# Altium PCB STM8 Oscillograph.PcbDoc (part 3 of 3)
Units mm, origin at the board's own origin, x right, y up, seen from the top; angles counter-clockwise.
Board outline 26.01 x 35.08 mm, 2 copper layers (Top Layer, Bottom Layer); 152 components, 126 nets, 536 pads, 88 vias.
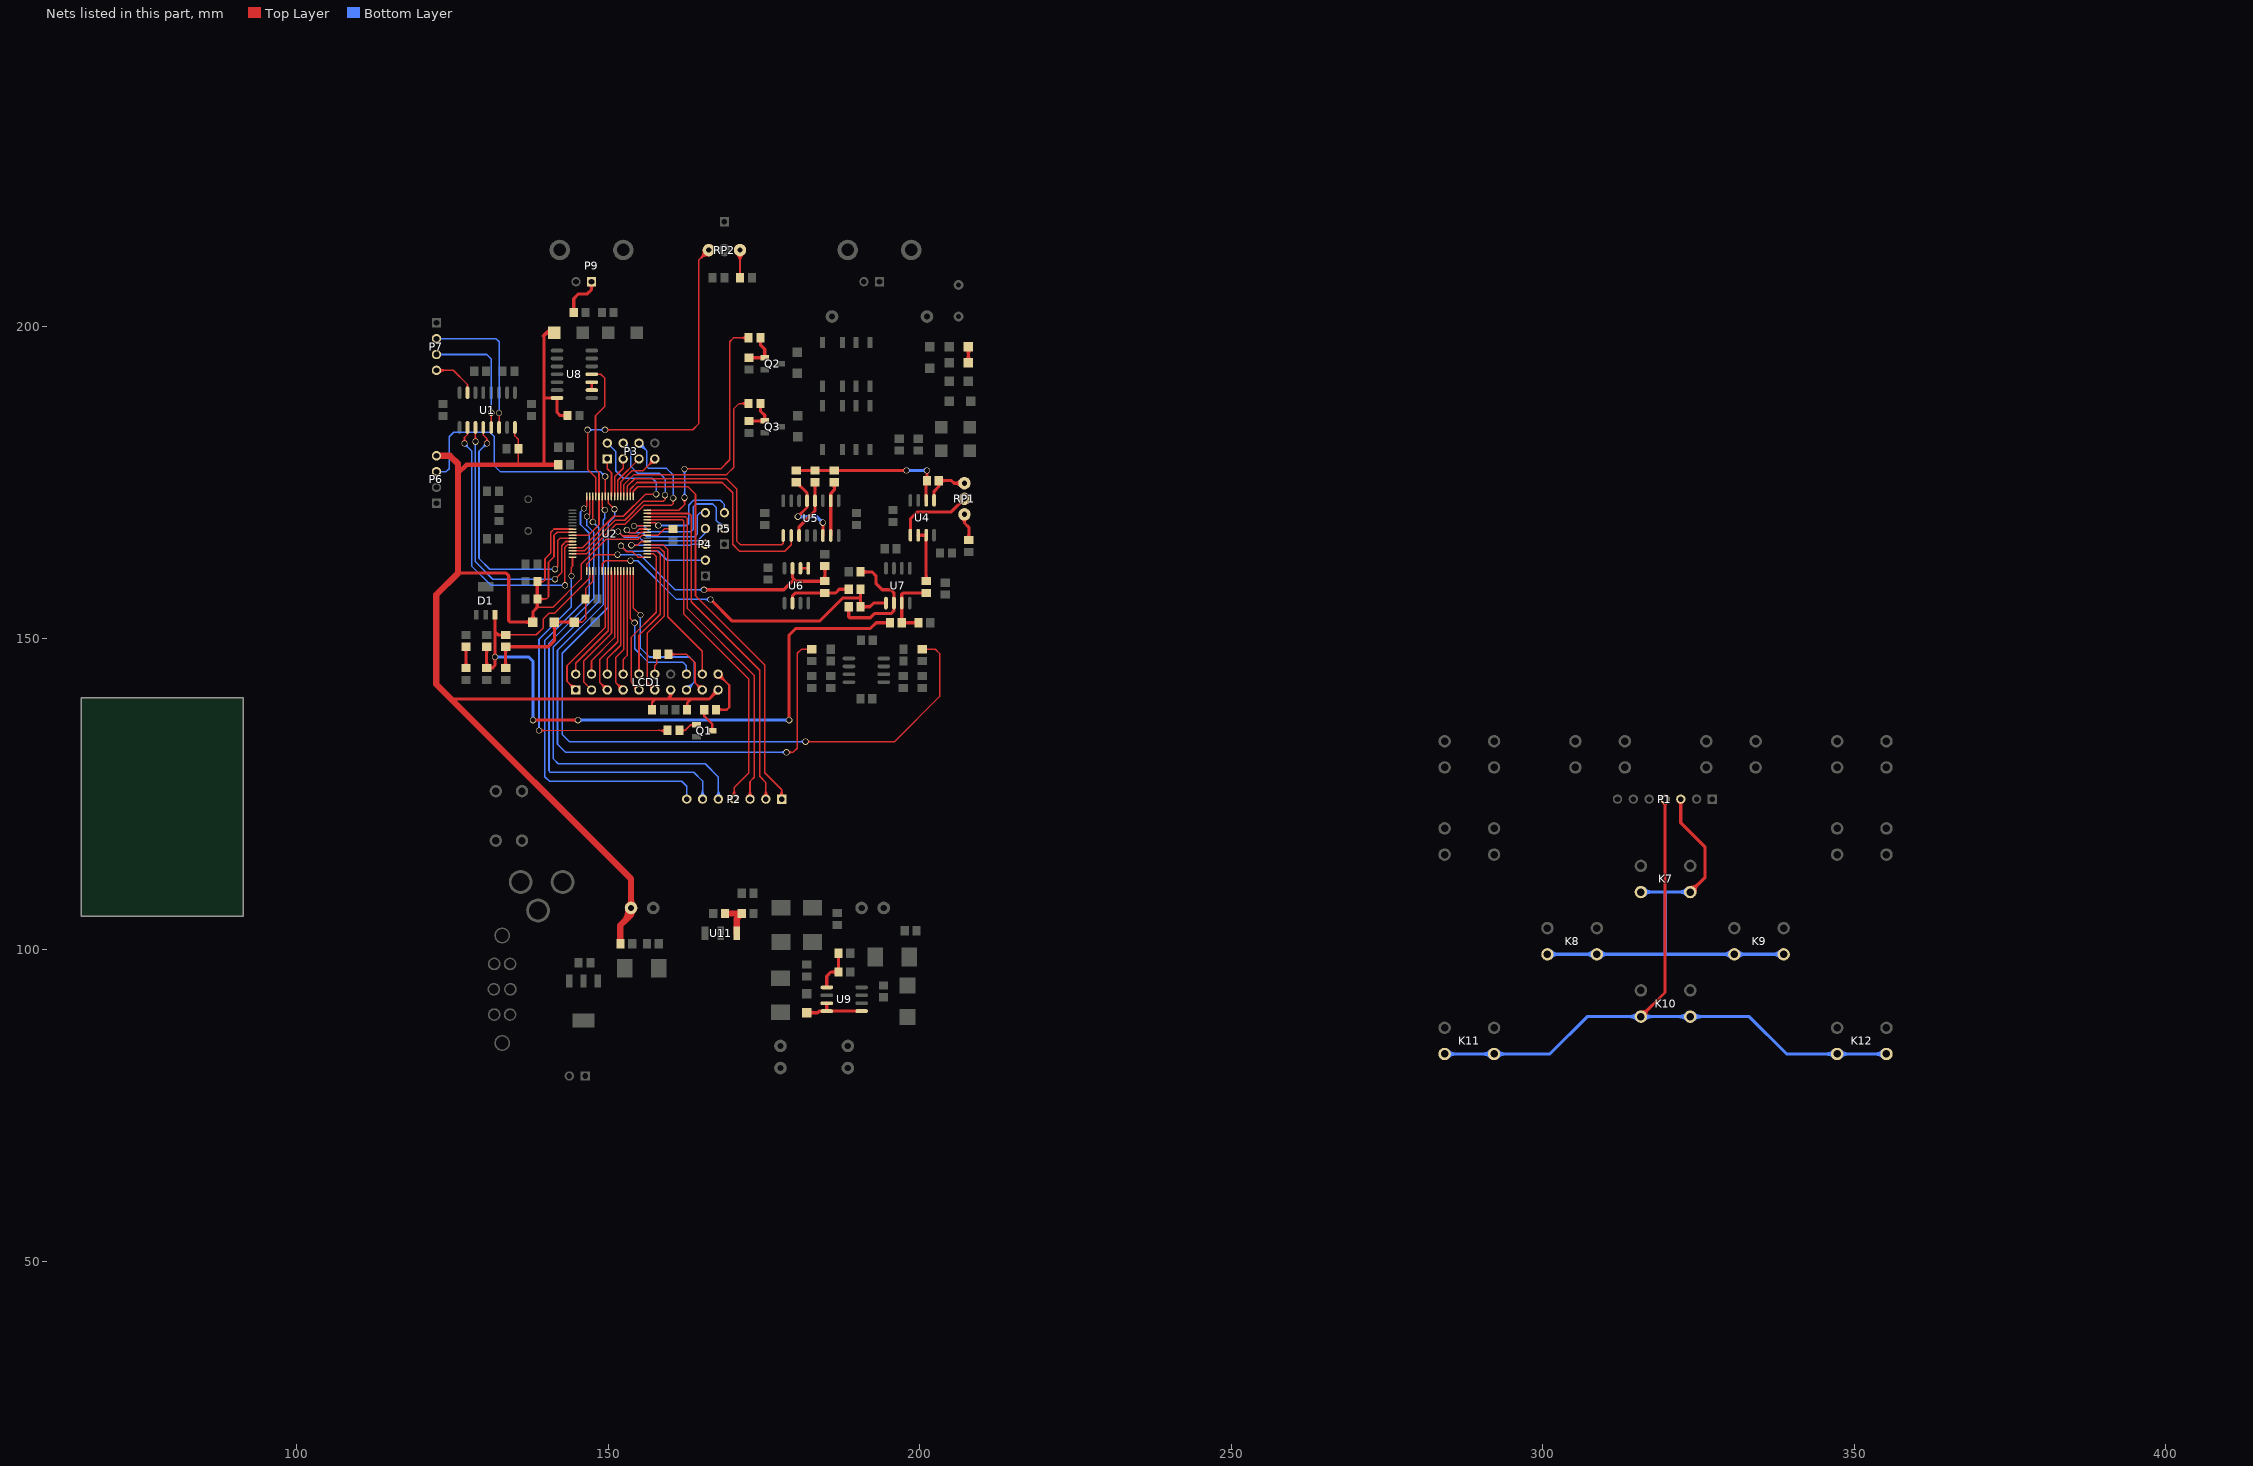
[diagram p3: the nets of this part, all layers, seen from the top]

## Via types
v1: diameter 1, hole 0.8, Top Layer to Bottom Layer, tented both sides, 88 vias

## Nets (pads, with @x,y where several pads share a name; then routed paths per layer and width w, separated by ;. In a path a pad name is that pad's centre, name@x,y a point inside that pad or via, vN(x,y) a via of type N, cw(c..) or ccw(c..) an arc to the next point about the centre after c; other vN are vias at no path point) (continued)
NetK7_1: K7.1 K7.4 K8.1 K8.4 K9.1 K9.4 P1.3 | length 100.6
  Top Layer w0.508: P1.3@321.835,123.855 cw(c320.989,123.009) 322.186,123.009 cw(c323.383,123.009) P1.3@322.537,123.855 ; P1.3@322.186,124.206 322.186,120.384 326.085,116.484 326.085,111.662 K7.1@323.71,109.287 ; K7.1@323.71,110.033 ccw(c323.71,111.834) 324.983,110.561 ccw(c326.257,109.287) K7.1@324.456,109.287
  Bottom Layer w0.508: K8.4@300.78,99.287 K9.1@338.71,99.287 ; K8.4@301.307,98.76 cw(c302.581,97.486) 302.581,99.287 cw(c302.581,101.088) K8.4@301.307,99.815 ; K8.1@308.183,98.76 ccw(c306.909,97.486) 306.909,99.287 ccw(c306.909,101.088) K8.1@308.183,99.815 ; K8.1@309.238,98.76 cw(c310.511,97.486) 310.511,99.287 cw(c310.511,101.088) K8.1@309.238,99.815 ; K7.4@315.78,109.287 K7.1@323.71,109.287 ; K7.4@316.308,108.76 cw(c317.581,107.486) 317.581,109.287 cw(c317.581,111.088) K7.4@316.308,109.815 ; 319.684,99.363 319.684,109.287 ; K7.1@323.182,108.76 ccw(c321.909,107.486) 321.909,109.287 ccw(c321.909,111.088) K7.1@323.182,109.815 ; K9.4@330.252,98.76 ccw(c328.979,97.486) 328.979,99.287 ccw(c328.979,101.088) K9.4@330.252,99.815 ; K9.4@331.307,98.76 cw(c332.581,97.486) 332.581,99.287 cw(c332.581,101.088) K9.4@331.307,99.815 ; K9.1@338.183,98.76 ccw(c336.909,97.486) 336.909,99.287 ccw(c336.909,101.088) K9.1@338.183,99.815
NetK10_1: K10.1 K10.4 K11.1 K11.4 K12.1 K12.4 P1.4 | length 145.4
  Top Layer w0.508: K10.4@315.78,89.287 319.646,93.153 P1.4@319.646,124.206 ; K10.4@315.78,90.033 ccw(c315.78,91.834) 317.054,90.56 ccw(c318.327,89.287) K10.4@316.526,89.287 ; P1.4@319.295,123.855 cw(c318.449,123.009) 319.646,123.009 cw(c320.843,123.009) P1.4@319.997,123.855
  Bottom Layer w0.508: K11.4@284.28,83.287 301.143,83.287 307.143,89.287 333.191,89.287 339.191,83.287 K12.1@355.21,83.287 ; K11.4@284.808,82.76 cw(c286.081,81.486) 286.081,83.287 cw(c286.081,85.088) K11.4@284.808,83.815 ; K11.1@291.682,82.76 ccw(c290.409,81.486) 290.409,83.287 ccw(c290.409,85.088) K11.1@291.682,83.815 ; K11.1@292.737,82.76 cw(c294.011,81.486) 294.011,83.287 cw(c294.011,85.088) K11.1@292.737,83.815 ; K10.4@315.253,88.759 ccw(c313.979,87.486) 313.979,89.287 ccw(c313.979,91.088) K10.4@315.253,89.814 ; K10.4@316.308,88.759 cw(c317.581,87.486) 317.581,89.287 cw(c317.581,91.088) K10.4@316.308,89.814 ; K10.1@323.182,88.759 ccw(c321.909,87.486) 321.909,89.287 ccw(c321.909,91.088) K10.1@323.182,89.814 ; K10.1@324.237,88.759 cw(c325.511,87.486) 325.511,89.287 cw(c325.511,91.088) K10.1@324.237,89.814 ; K12.4@346.753,82.76 ccw(c345.479,81.486) 345.479,83.287 ccw(c345.479,85.088) K12.4@346.753,83.815 ; K12.4@347.808,82.76 cw(c349.081,81.486) 349.081,83.287 cw(c349.081,85.088) K12.4@347.808,83.815 ; K12.1@354.683,82.76 ccw(c353.409,81.486) 353.409,83.287 ccw(c353.409,85.088) K12.1@354.683,83.815
NetLCD1_1: LCD1.1 U2.23 | length 26
  Top Layer w0.254: LCD1.1@144.157,141.732 ccw(c142.653,141.732) 143.716,142.796 ccw(c144.78,143.859) LCD1.1@144.78,142.355 ; LCD1.1@144.411,141.732 ccw(c143.52,141.732) 144.15,142.362 ccw(c144.78,142.992) LCD1.1@144.78,142.101 ; LCD1.1@144.78,141.732 143.383,143.129 143.383,145.618 149.522,151.757 U2.23@149.522,160.811
NetLCD1_2: LCD1.2 U2.24 | length 18.7
  Top Layer w0.254: LCD1.2@144.78,144.272 144.78,145.999 150.022,151.241 U2.24@150.022,160.811
NetLCD1_3: LCD1.3 U2.25 | length 21.4
  Top Layer w0.254: LCD1.3@147.32,141.732 146.101,142.951 146.101,146.406 150.522,150.827 U2.25@150.522,160.811
NetLCD1_4: LCD1.4 U2.26 | length 18.1
  Top Layer w0.254: LCD1.4@147.32,144.272 147.32,146.431 151.022,150.133 U2.26@151.022,160.811
NetLCD1_5: LCD1.5 U2.27 | length 24.6
  Top Layer w0.254: LCD1.5@149.237,141.732 ccw(c147.733,141.732) 148.796,142.796 ccw(c149.86,143.859) LCD1.5@149.86,142.355 ; LCD1.5@149.491,141.732 ccw(c148.6,141.732) 149.23,142.362 ccw(c149.86,142.992) LCD1.5@149.86,142.101 ; LCD1.5@149.86,141.732 148.615,142.977 148.615,146.558 151.522,149.465 U2.27@151.522,160.811
NetLCD1_6: LCD1.6 U2.28 | length 17.4
  Top Layer w0.254: LCD1.6@149.86,144.272 149.86,146.761 152.022,148.923 U2.28@152.022,160.811
NetLCD1_7: LCD1.7 U2.29 | length 23.9
  Top Layer w0.254: LCD1.7@151.777,141.732 ccw(c150.273,141.732) 151.336,142.796 ccw(c152.4,143.859) LCD1.7@152.4,142.355 ; LCD1.7@152.031,141.732 ccw(c151.14,141.732) 151.77,142.362 ccw(c152.4,142.992) LCD1.7@152.4,142.101 ; LCD1.7@152.4,141.732 151.206,142.926 151.206,146.939 152.522,148.255 U2.29@152.522,160.811
NetLCD1_8: LCD1.8 U2.30 | length 16.8
  Top Layer w0.254: LCD1.8@152.4,144.272 152.4,146.634 153.022,147.256 U2.30@153.022,160.811
NetLCD1_9: LCD1.9 U2.34 | length 29
  Top Layer w0.254: LCD1.9@154.317,141.732 ccw(c152.813,141.732) 153.876,142.796 ccw(c154.94,143.859) LCD1.9@154.94,142.355 ; LCD1.9@154.571,141.732 ccw(c153.68,141.732) 154.31,142.362 ccw(c154.94,142.992) LCD1.9@154.94,142.101 ; LCD1.9@154.94,141.732 153.721,142.951 153.721,150.216 157.709,154.203 157.709,163.17 157.317,163.561 U2.34@156.272,163.561
NetLCD1_10: LCD1.10 U2.35 | length 22.9
  Top Layer w0.254: LCD1.10@154.94,144.272 154.94,150.495 158.344,153.899 158.344,163.477 157.759,164.061 U2.35@156.272,164.061
NetLCD1_11: LCD1.11 U2.36 | length 30.5
  Top Layer w0.254: U2.36@156.272,164.561 158.248,164.561 158.979,163.83 158.979,153.594 156.27,150.885 156.27,142.942 LCD1.11@157.48,141.732 ; LCD1.11@156.857,141.732 ccw(c155.353,141.732) 156.416,142.796 ccw(c157.48,143.859) LCD1.11@157.48,142.355 ; LCD1.11@157.111,141.732 ccw(c156.22,141.732) 156.85,142.362 ccw(c157.48,142.992) LCD1.11@157.48,142.101
NetLCD1_12: LCD1.12 R7.1 | length 3.3
  Top Layer w0.254: LCD1.12@157.48,144.272 157.48,145.644 157.8,145.964 R7.1@157.8,147.447
NetLCD1_15: LCD1.15 U2.32 | length 31.2
  Top Layer w0.254: U2.32@154.022,160.811 154.022,154.893 v1(155.169,153.746)
  Bottom Layer w0.254: v1(155.169,153.746) 155.169,148.463 156.616,147.015 163.043,147.015 163.855,146.202 163.855,143.027 LCD1.15@162.56,141.732 ; LCD1.15@162.56,142.101 ccw(c162.56,142.992) 163.19,142.362 ccw(c163.82,141.732) LCD1.15@162.929,141.732 ; LCD1.15@162.56,142.355 ccw(c162.56,143.859) 163.624,142.796 ccw(c164.687,141.732) LCD1.15@163.183,141.732
NetLCD1_16: LCD1.16 U2.31 | length 23.5
  Top Layer w0.254: U2.31@153.522,160.811 153.522,153.208 v1@154.242,152.489
  Bottom Layer w0.254: v1@154.242,152.489 154.242,148.349 156.388,146.202 161.95,146.202 162.56,145.593 LCD1.16@162.56,144.272
  other v1: 154.254,152.502
NetLCD1_17: LCD1.17 R7.2 | length 15.4
  Top Layer w0.254: R7.2@159.7,147.447 162.56,147.447 163.932,146.075 163.932,142.9 LCD1.17@165.1,141.732 ; R7.2@160.07,147.077 cw(c160.963,146.184) 160.963,147.447 cw(c160.963,148.71) R7.2@160.07,147.817 ; LCD1.17@164.477,141.732 ccw(c162.973,141.732) 164.036,142.796 ccw(c165.1,143.859) LCD1.17@165.1,142.355 ; LCD1.17@164.731,141.732 ccw(c163.84,141.732) 164.47,142.362 ccw(c165.1,142.992) LCD1.17@165.1,142.101
NetLCD1_18: LCD1.18 U2.37 | length 25.9
  Top Layer w0.254: U2.37@156.272,165.061 158.764,165.061 159.563,164.262 159.563,153.492 165.1,147.955 LCD1.18@165.1,144.272
NetLCD1_20: LCD1.20 R8.2 | length 12.2
  Top Layer w0.381: R8.2@167.32,138.557 169.012,138.557 169.418,138.963 169.418,142.494 LCD1.20@167.64,144.272 ; LCD1.20@167.64,143.713 cw(c167.64,142.362) 168.595,143.317 cw(c169.55,144.272) LCD1.20@168.199,144.272 ; R8.2@167.645,138.232 cw(c168.429,137.448) 168.429,138.557 cw(c168.429,139.666) R8.2@167.645,138.882
NetP2_1: P2.1 U2.49 | length 70
  Top Layer w0.254: U2.49@154.022,172.811 154.022,173.631 154.737,174.346 162.814,174.346 164.008,173.152 164.008,156.87 175.133,145.745 175.133,128.422 177.845,125.71 P2.1@177.845,124.206 ; P2.1@177.404,124.647 ccw(c176.341,125.71) 177.845,125.71 ccw(c179.349,125.71) P2.1@178.286,124.647 ; P2.1@177.584,124.467 ccw(c176.954,125.097) 177.845,125.097 ccw(c178.736,125.097) P2.1@178.106,124.467
NetP2_2: P2.2 U2.47 | length 61.5
  Top Layer w0.254: U2.47@156.272,170.061 163.035,170.061 163.347,169.748 163.347,155.88 174.32,144.907 174.32,127.864 175.305,126.879 P2.2@175.305,124.206 ; P2.2@174.864,124.647 ccw(c173.801,125.71) 175.305,125.71 ccw(c176.809,125.71) P2.2@175.746,124.647 ; P2.2@175.044,124.467 ccw(c174.414,125.097) 175.305,125.097 ccw(c176.196,125.097) P2.2@175.566,124.467
NetP2_3: P2.3 U2.46 | length 60.1
  Top Layer w0.254: U2.46@156.272,169.561 162.417,169.561 162.712,169.266 162.712,154.788 173.457,144.043 173.457,127.711 172.765,127.02 P2.3@172.765,124.206 ; P2.3@172.324,124.647 ccw(c171.261,125.71) 172.765,125.71 ccw(c174.269,125.71) P2.3@173.206,124.647 ; P2.3@172.504,124.467 ccw(c171.874,125.097) 172.765,125.097 ccw(c173.656,125.097) P2.3@173.026,124.467
NetP2_4: P2.4 U2.45 | length 59.7
  Top Layer w0.254: U2.45@156.272,169.061 161.901,169.061 162.128,168.834 162.128,153.924 172.593,143.459 172.593,128.422 170.225,126.054 P2.4@170.225,124.206 ; P2.4@169.784,124.647 ccw(c168.721,125.71) 170.225,125.71 ccw(c171.729,125.71) P2.4@170.666,124.647 ; P2.4@169.964,124.467 ccw(c169.334,125.097) 170.225,125.097 ccw(c171.116,125.097) P2.4@170.486,124.467
NetP2_5: P2.5 U2.62 | length 80.5
  Top Layer w0.254: v1(147.522,168.707) U2.62@147.522,172.811
  Bottom Layer w0.254: v1(147.522,168.707) 148.463,167.766 148.463,155.931 141.199,148.666 141.199,130.658 141.986,129.87 165.557,129.87 167.685,127.742 P2.5@167.685,124.206 ; P2.5@167.244,124.647 ccw(c166.181,125.71) 167.685,125.71 ccw(c169.189,125.71) P2.5@168.126,124.647 ; P2.5@167.424,124.467 ccw(c166.794,125.097) 167.685,125.097 ccw(c168.576,125.097) P2.5@167.946,124.467
NetP2_6: P2.6 U2.63 | length 79.7
  Top Layer w0.254: v1(146.583,169.57) 147.022,170.009 U2.63@147.022,172.811
  Bottom Layer w0.254: v1(146.583,169.57) 146.583,168.123 147.701,167.005 147.701,156.464 140.487,149.25 140.487,128.727 140.691,128.524 163.728,128.524 165.145,127.107 P2.6@165.145,124.206 ; P2.6@164.704,124.647 ccw(c163.641,125.71) 165.145,125.71 ccw(c166.649,125.71) P2.6@165.586,124.647 ; P2.6@164.884,124.467 ccw(c164.254,125.097) 165.145,125.097 ccw(c166.036,125.097) P2.6@165.406,124.467
NetP2_7: P2.7 U2.64 | length 74.4
  Top Layer w0.254: v1(146.126,170.866) 146.522,171.262 U2.64@146.522,172.811
  Bottom Layer w0.254: v1(146.126,170.866) 145.552,170.292 145.552,168.29 146.964,166.878 146.964,156.794 139.827,149.657 139.827,127.813 140.564,127.076 161.798,127.076 162.605,126.269 P2.7@162.605,124.206
NetP3_1: P3.1 U2.56 | length 6.3
  Top Layer w0.254: P3.1@149.86,178.816 149.86,177.241 150.522,176.579 U2.56@150.522,172.811
NetP3_2: P3.2 U2.55 | length 6.6
  Top Layer w0.254: U2.55@151.022,172.811 151.022,175.939 152.4,177.317 P3.2@152.4,178.816
NetP3_3: P3.3 U2.54 | length 7.4
  Top Layer w0.254: U2.54@151.522,172.811 151.522,175.398 P3.3@154.94,178.816
NetP3_4: P3.4 U2.53 | length 13.1
  Top Layer w0.254: U2.53@152.022,172.811 152.022,175.111 153.822,176.911 155.575,176.911 P3.4@157.48,178.816 ; P3.4@156.857,178.816 cw(c155.353,178.816) 156.416,177.752 cw(c157.48,176.689) P3.4@157.48,178.193 ; P3.4@157.111,178.816 cw(c156.22,178.816) 156.85,178.186 cw(c157.48,177.556) P3.4@157.48,178.447
NetP3_5: P3.5 U2.13 | length 31.2
  Top Layer w0.254: U2.13@144.272,164.561 145.867,164.561 150.906,169.601 152.43,169.601 155.981,173.152 v1(157.709,173.152)
  Bottom Layer w0.254: P3.5@149.86,181.356 151.206,180.01 151.206,176.911 152.4,175.717 157.074,175.717 157.709,175.082 v1(157.709,173.152)
NetP3_6: P3.6 U2.14 | length 36
  Top Layer w0.254: U2.14@144.272,164.061 146.179,164.061 151.097,168.979 152.634,168.979 155.657,172.002 158.845,172.002 159.131,172.288 v1(159.131,172.999)
  Bottom Layer w0.254: P3.6@152.4,180.733 cw(c152.4,179.229) 153.464,180.292 cw(c154.527,181.356) P3.6@153.023,181.356 ; P3.6@152.4,180.987 cw(c152.4,180.096) 153.03,180.726 cw(c153.66,181.356) P3.6@152.769,181.356 ; P3.6@152.4,181.356 153.645,180.111 153.645,177.597 154.762,176.479 158.293,176.479 159.131,175.641 v1(159.131,172.999)
NetP3_7: P3.7 U2.15 | length 36.9
  Top Layer w0.254: U2.15@144.272,163.561 146.492,163.561 151.282,168.351 152.73,168.351 155.753,171.374 160.147,171.374 160.426,171.653 v1(160.426,172.517)
  Bottom Layer w0.254: P3.7@154.94,180.733 cw(c154.94,179.229) 156.004,180.292 cw(c157.067,181.356) P3.7@155.563,181.356 ; P3.7@154.94,180.987 cw(c154.94,180.096) 155.57,180.726 cw(c156.2,181.356) P3.7@155.309,181.356 ; P3.7@154.94,181.356 156.21,180.086 156.21,177.597 156.515,177.292 159.36,177.292 160.426,176.225 v1(160.426,172.517)
NetP4_2: P4.2 U2.33 | length 19.5
  Top Layer w0.254: v1(152.044,164.871) 152.984,163.932 153.899,163.932 154.769,163.061 U2.33@156.272,163.061
  Bottom Layer w0.254: v1(152.044,164.871) 152.933,163.982 158.039,163.982 159.461,162.56 P4.2@165.608,162.56
NetP4_3: P4.3 U2.38 | length 14.8
  Top Layer w0.254: v1(153.708,164.96) 154.699,164.96 155.299,165.561 U2.38@156.272,165.561
  Bottom Layer w0.254: v1(153.708,164.96) 163.157,164.96 163.297,165.1 P4.3@165.608,165.1
NetP4_4: P4.4 U2.41 | length 21.1
  Top Layer w0.254: v1(151.587,167.183) 152.324,166.446 154.635,166.446 155.25,167.061 U2.41@156.272,167.061
  Bottom Layer w0.254: v1(151.587,167.183) 152.552,166.218 155.016,166.218 155.55,165.684 164.338,165.684 165.608,166.954 P4.4@165.608,167.64
NetP4_5: P4.5 U2.42 | length 20.9
  Top Layer w0.254: v1(152.984,167.386) 153.416,166.954 154.381,166.954 154.988,167.561 U2.42@156.272,167.561
  Bottom Layer w0.254: v1(152.984,167.386) 153.416,166.954 155.524,166.954 156.159,166.319 163.881,166.319 164.313,166.751 164.313,169.748 164.744,170.18 ; P4.5@165.017,169.984 ccw(c164.744,169.893) 164.744,170.18 ; P4.5@165.017,170.376 cw(c164.744,170.467) 164.744,170.18 ; P4.5@165.608,170.18 164.744,170.18
NetP5_2: P5.2 U2.43 | length 27.6
  Top Layer w0.254: v1(154.153,168.061) U2.43@156.272,168.061
  Bottom Layer w0.254: v1(154.153,168.061) 155.687,168.061 156.616,167.132 163.297,167.132 163.652,167.488 163.652,171.094 164.135,171.577 166.802,171.577 167.31,171.069 167.31,168.986 P5.2@168.656,167.64 ; P5.2@168.033,167.64 ccw(c166.529,167.64) 167.592,168.704 ccw(c168.656,169.767) P5.2@168.656,168.263 ; P5.2@168.287,167.64 ccw(c167.396,167.64) 168.026,168.27 ccw(c168.656,168.9) P5.2@168.656,168.009
NetP5_3: P5.3 U2.44 | length 17.6
  Top Layer w0.254: U2.44@156.272,168.561 157.6,168.561 v1(158.039,168.123)
  Bottom Layer w0.254: v1(158.039,168.123) 162.636,168.123 162.941,168.427 162.941,171.399 163.703,172.161 167.996,172.161 168.656,171.501 P5.3@168.656,170.18
NetP6_3: P6.3 U2.58 | length 43
  Top Layer w0.254: U2.58@149.522,172.811 v1(149.522,175.997)
  Bottom Layer w0.254: P6.3@122.428,176.784 124.003,176.784 124.46,177.241 124.46,182.372 125.197,183.109 131.013,183.109 131.674,182.448 131.674,177.749 132.639,176.784 148.735,176.784 v1(149.522,175.997) ; v1@149.149,175.997 ccw(c148.249,175.997) 148.885,176.633 ccw(c149.522,177.27) v1@149.522,176.37
NetP7_2: P7.2 U1.14 | length 24
  Top Layer w0.254: U1.14@132.486,183.871 v1(132.486,186.207)
  Bottom Layer w0.254: P7.2@122.428,198.12 131.978,198.12 132.486,197.612 v1(132.486,186.207)
NetP7_3: P7.3 U1.13 | length 20.1
  Top Layer w0.254: U1.13@131.216,183.871 v1(131.216,186.233)
  Bottom Layer w0.254: P7.3@122.428,195.58 130.48,195.58 131.216,194.843 v1(131.216,186.233)
NetP7_4: P7.4 U1.7 | length 11
  Top Layer w0.254: P7.4@122.428,193.04 125.12,193.04 127.406,190.754 U1.7@127.406,189.459 ; P7.4@122.689,192.779 cw(c123.319,192.149) 123.319,193.04 cw(c123.319,193.931) P7.4@122.689,193.301 ; P7.4@122.869,192.599 cw(c123.932,191.536) 123.932,193.04 cw(c123.932,194.544) P7.4@122.869,193.481
NetP9_1: P9.1 R35.1 | length 8.8
  Top Layer w0.508: R35.1@144.465,202.311 144.465,204.536 145.237,205.308 146.634,205.308 147.32,205.994 P9.1@147.32,207.264 ; P9.1@146.969,206.913 cw(c146.123,206.067) 147.32,206.067 cw(c148.517,206.067) P9.1@147.671,206.913
NetQ1_1: Q1.1 R9.2 | length 5.2
  Top Layer w0.254: R9.2@161.427,135.255 162.357,135.255 ; R9.2@161.874,134.984 cw(c162.357,134.69) 162.357,135.255 ; R9.2@161.874,135.526 ccw(c162.357,135.82) 162.357,135.255 ; Q1.1@163.658,135.946 ccw(c163.246,135.616) 163.246,136.144 ; Q1.1@163.658,136.342 cw(c163.246,136.672) 163.246,136.144 ; Q1.1@164.16,136.144 163.246,136.144 ; 162.357,135.255 163.246,136.144
NetQ1_3: Q1.3 R8.1 | length 6.2
  Top Layer w0.381: R8.1@165.14,138.092 cw(c164.706,137.526) 165.42,137.526 ; R8.1@165.42,138.557 165.42,137.526 ; R8.1@165.7,138.092 ccw(c166.134,137.526) 165.42,137.526 ; Q1.3@166.521,135.371 ccw(c166.087,135.805) 166.7,135.805 ccw(c167.313,135.805) Q1.3@166.88,135.371 ; Q1.3@166.7,135.191 166.7,136.246 165.42,137.526
NetQ2_1: Q2.1 R12.2 R13.2 | length 7.5
  Top Layer w0.508: R12.2@172.593,195.057 172.608,195.072 Q2.1@175.133,195.072 175.133,196.418 174.432,197.119 R13.2@174.432,198.247 ; Q2.1@174.744,194.937 ccw(c174.419,194.612) 174.419,195.072 ccw(c174.419,195.532) Q2.1@174.744,195.207 ; Q2.1@174.998,195.207 ccw(c174.673,195.532) 175.133,195.532 ccw(c175.593,195.532) Q2.1@175.268,195.207
NetQ3_1: Q3.1 R22.2 R23.2 | length 6.4
  Top Layer w0.508: R22.2@172.593,184.897 172.608,184.912 Q3.1@175.133,184.912 175.133,185.801 174.432,186.502 R23.2@174.432,187.706 ; Q3.1@174.744,184.777 ccw(c174.419,184.452) 174.419,184.912 ccw(c174.419,185.372) Q3.1@174.744,185.047
NetR3_2: R3.2 R4.1 | length 6.4
  Top Layer w0.508: R4.1@126.898,145.517 ccw(c126.222,146.193) 127.178,146.193 ccw(c128.134,146.193) R4.1@127.458,145.517 ; R3.2@126.898,148.391 cw(c126.222,147.715) 127.178,147.715 cw(c128.134,147.715) R3.2@127.458,148.391 ; R4.1@127.178,145.237 R3.2@127.178,148.671
NetR9_1: R9.1 U2.16 | length 54.9
  Top Layer w0.254: v1(138.887,135.204) R9.1@159.527,135.255 ; v1@139.15,135.469 ccw(c139.785,136.107) 139.788,135.206 ccw(c139.79,134.306) v1@139.152,134.941 ; v1(144.094,160.02) 144.094,161.442 144.272,161.62 U2.16@144.272,163.061 ; 158.023,135.251 cw(c158.027,133.647) R9.1@159.158,134.784 ; 158.506,135.252 ccw(c158.503,136.174) R9.1@159.156,135.524 ; 158.636,135.253 cw(c158.639,134.262) R9.1@159.337,134.964
  Bottom Layer w0.254: v1(138.887,135.204) 138.887,149.885 144.094,155.092 v1(144.094,160.02)
NetR10_1: R10.1 R11.1 R31.1 U7.3 | length 14.2
  Top Layer w0.508: R10.1@197.409,152.247 cw(c198.085,151.571) 198.085,152.527 cw(c198.085,153.483) R10.1@197.409,152.807 ; R11.1@199.516,152.247 ccw(c198.84,151.571) 198.84,152.527 ccw(c198.84,153.483) R11.1@199.516,152.807 ; R11.1@199.796,152.527 R10.1@197.129,152.527 U7.3@197.129,155.677 197.129,157.124 197.297,157.292 R31.1@201.041,157.292
NetR13_1: R13.1 U2.48 | length 48.4
  Top Layer w0.254: U2.48@156.272,170.561 161.341,170.561 162.255,171.475 v1(162.255,172.593) ; v1@161.991,172.329 cw(c161.355,171.693) 162.255,171.693 cw(c163.156,171.693) v1@162.519,172.329 ; v1(162.255,177.216) 168.046,177.216 169.494,178.664 169.494,197.637 170.104,198.247 R13.1@172.532,198.247 ; R13.1@172.162,197.877 ccw(c171.269,196.984) 171.269,198.247 ccw(c171.269,199.51) R13.1@172.162,198.617
  Bottom Layer w0.254: v1@161.991,172.857 ccw(c161.355,173.493) 162.255,173.493 ccw(c163.156,173.493) v1@162.519,172.857 ; v1@161.991,176.952 cw(c161.355,176.315) 162.255,176.315 cw(c163.156,176.315) v1@162.519,176.952 ; v1(162.255,172.593) v1(162.255,177.216)
NetR14_1: R14.1 R15.2 | length 6.4
  Top Layer w0.508: R15.2@207.464,194.618 ccw(c206.596,195.486) 207.823,195.486 ccw(c209.049,195.486) R15.2@208.182,194.618 ; R14.1@207.464,196.44 cw(c206.596,195.573) 207.823,195.573 cw(c209.049,195.573) R14.1@208.182,196.44 ; R15.2@207.823,194.259 R14.1@207.823,196.799
NetR19_2: R19.2 U2.59 | length 103
  Top Layer w0.254: U2.59@149.022,172.811 149.022,171.043 v1(149.454,170.612) ; v1(178.613,131.724) 179.68,131.724 180.34,132.385 180.34,147.599 181.011,148.27 R19.2@182.651,148.27 ; v1@178.877,131.461 cw(c179.513,130.824) 179.513,131.724 cw(c179.513,132.625) v1@178.877,131.988
  Bottom Layer w0.254: v1(149.454,170.612) 149.454,169.291 149.225,169.062 149.225,155.448 141.859,148.082 141.859,133.02 143.154,131.724 v1(178.613,131.724) ; v1@178.349,131.461 ccw(c177.712,130.824) 177.712,131.724 ccw(c177.712,132.625) v1@178.349,131.988
NetR20_2: R20.2 U2.57 | length 119
  Top Layer w0.254: U2.57@150.022,172.811 150.022,171.745 v1(151.028,170.739) ; v1(181.661,133.426) 195.961,133.426 203.2,140.665 203.2,147.574 202.504,148.27 R20.2@200.431,148.27 ; v1@181.925,133.162 cw(c182.561,132.526) 182.561,133.426 cw(c182.561,134.327) v1@181.925,133.69
  Bottom Layer w0.254: v1(151.028,170.739) 151.028,169.596 149.987,168.554 149.987,154.991 142.621,147.625 142.621,134.595 143.789,133.426 v1(181.661,133.426) ; v1@181.397,133.162 ccw(c180.76,132.526) 180.76,133.426 ccw(c180.76,134.327) v1@181.397,133.69
NetR23_1: R23.1 U2.52 | length 34.8
  Top Layer w0.254: U2.52@152.522,172.811 152.522,174.696 154.127,176.301 168.986,176.301 170.18,177.495 170.18,186.893 170.993,187.706 R23.1@172.532,187.706 ; R23.1@172.162,187.336 ccw(c171.269,186.443) 171.269,187.706 ccw(c171.269,188.969) R23.1@172.162,188.076
NetR24_1: R24.1 RP1.3 U4.1 | length 11.8
  Top Layer w0.508: U4.1@202.311,172.161 202.311,173.634 203.058,174.381 R24.1@203.058,175.336 205.105,175.336 205.526,174.915 RP1.3@207.188,174.915 ; R24.1@203.338,175.056 cw(c204.014,174.38) 204.014,175.336 cw(c204.014,176.292) R24.1@203.338,175.616 ; RP1.3@206.63,174.419 ccw(c205.526,173.437) 205.526,174.915 ccw(c205.526,176.393) RP1.3@206.63,175.411
NetR24_2: R24.2 R25.2 R26.2 R27.2 U4.2 | length 31.7
  Top Layer w0.508: R27.2@180.213,176.972 R26.2@186.309,176.972 ; R25.2@183.185,176.972 R26.2@186.309,176.972 ; v1@197.702,176.798 ccw(c197.282,176.378) 197.282,176.972 ccw(c197.282,177.566) v1@197.702,177.146 ; v1(197.876,176.972) R26.2@186.309,176.972 ; U4.2@201.041,172.161 201.041,175.219 R24.2@201.158,175.336 v1(201.158,176.972)
  Bottom Layer w0.508: v1(197.876,176.972) v1(201.158,176.972) ; v1@198.05,176.798 cw(c198.47,176.378) 198.47,176.972 ; v1@198.05,177.146 ccw(c198.47,177.566) 198.47,176.972 ; 200.564,176.972 cw(c200.564,176.378) v1@200.984,176.798 ; 200.564,176.972 ccw(c200.564,177.566) v1@200.984,177.146
NetR25_1: R25.1 U5.4 U5.11 | length 11.1
  Top Layer w0.508: U5.11@180.645,166.522 180.645,167.919 183.185,170.459 U5.4@183.185,172.11 R25.1@183.185,175.072 ; R25.1@182.905,174.792 cw(c182.229,174.116) 183.185,174.116 cw(c184.141,174.116) R25.1@183.465,174.792
NetR26_1: R26.1 U5.2 U5.15 | length 10.3
  Top Layer w0.508: U5.15@185.725,166.522 U5.2@185.725,172.11 185.725,173.253 186.309,173.838 R26.1@186.309,175.072 ; R26.1@186.029,174.792 cw(c185.353,174.116) 186.309,174.116 cw(c187.265,174.116) R26.1@186.589,174.792
NetR27_1: R27.1 U5.5 U5.14 | length 15.2
  Top Layer w0.508: R27.1@180.213,175.072 181.915,173.37 U5.5@181.915,172.11 181.915,171.018 v1(180.442,169.545) ; U5.14@184.455,166.522 v1(184.455,168.58)
  Bottom Layer w0.508: v1(180.442,169.545) 183.49,169.545 v1(184.455,168.58) ; v1@180.616,169.371 cw(c181.036,168.951) 181.036,169.545 cw(c181.036,170.139) v1@180.616,169.719 ; 184.034,169 ccw(c184.455,169.421) v1@184.455,168.826 ; 184.035,168.999 cw(c183.616,168.58) v1@184.209,168.58
NetR28_1: R28.1 RP1.1 | length 7.7
  Top Layer w0.508: RP1.1@206.777,169.293 cw(c206.273,168.529) 207.188,168.529 ; RP1.1@207.188,169.915 207.188,168.529 ; RP1.1@207.599,169.293 ccw(c208.103,168.529) 207.188,168.529 ; R28.1@207.619,166.076 ccw(c206.943,166.752) 207.899,166.752 ccw(c208.855,166.752) R28.1@208.179,166.076 ; R28.1@207.899,165.796 207.899,167.818 207.188,168.529
NetR29_1: R29.1 R33.1 U2.22 U7.1 | length 58.5
  Top Layer w0.254: U2.22@149.022,160.811 149.022,162.001 149.505,162.484 v1(153.568,162.484)
  Top Layer w0.508: v1(166.421,156.261) 169.901,152.781 183.921,152.781 187.63,156.489 190.51,156.489 ; R29.1@190.51,157.886 R33.1@190.51,155.073 191.979,155.073 192.583,155.677 U7.1@194.589,155.677 ; R33.1@190.79,154.793 cw(c191.466,154.117) 191.466,155.073 cw(c191.466,156.029) R33.1@190.79,155.353
  Bottom Layer w0.254: v1(153.568,162.484) 154.737,162.484 160.96,156.261 v1(166.421,156.261) ; v1@166.157,155.997 ccw(c165.52,155.36) 165.52,156.261 ccw(c165.52,157.161) v1@166.157,156.525
NetR29_2: R29.2 R30.1 U6.2 | length 10.6
  Top Layer w0.508: U6.2@179.578,155.677 179.578,156.87 180,157.292 R30.1@184.785,157.292 186.502,157.292 187.096,157.886 R29.2@188.61,157.886
NetR30_2: R30.2 R34.2 U2.17 U6.7 | length 53
  Top Layer w0.254: U2.17@146.522,160.811 146.522,161.914 148.057,163.449 v1(151.486,163.449)
  Top Layer w0.508: v1(165.379,157.81) 178.181,157.81 179.563,159.192 R30.2@184.785,159.192 R34.2@184.785,161.61 ; v1@165.553,157.636 cw(c165.973,157.216) 165.973,157.81 cw(c165.973,158.404) v1@165.553,157.984 ; U6.7@179.578,161.265 179.578,159.715 180.101,159.192 ; R30.2@184.505,159.472 ccw(c183.829,160.148) 184.785,160.148 ccw(c185.741,160.148) R30.2@185.065,159.472 ; R34.2@184.505,161.33 cw(c183.829,160.654) 184.785,160.654 cw(c185.741,160.654) R34.2@185.065,161.33
  Bottom Layer w0.254: v1(151.486,163.449) 155.092,163.449 160.731,157.81 v1(165.379,157.81) ; v1@165.116,157.546 ccw(c164.479,156.91) 164.479,157.81 ccw(c164.479,158.711) v1@165.116,158.074
NetR31_2: R31.2 U4.6 U4.7 | length 10.2
  Top Layer w0.508: U4.6@199.771,166.573 U4.7@201.041,166.573 R31.2@201.041,159.192 ; R31.2@200.761,159.472 ccw(c200.085,160.148) 201.041,160.148 ccw(c201.997,160.148) R31.2@201.321,159.472
NetR32_2: R32.2 R33.2 U7.2 | length 21.2
  Top Layer w0.508: R33.2@188.61,155.073 188.61,153.477 188.773,153.314 192.075,153.314 192.735,153.975 195.402,153.975 195.859,154.432 U7.2@195.859,155.677 195.859,157.353 195.402,157.81 194.005,157.81 192.964,158.852 192.964,160.071 192.354,160.68 R32.2@190.51,160.68 ; R32.2@190.79,160.4 cw(c191.466,159.724) 191.466,160.68 cw(c191.466,161.636) R32.2@190.79,160.96
NetR37_1: R37.1 RP2.1 | length 10.1
  Top Layer w0.254: RP2.1@170.539,211.727 cw(c169.049,210.237) 171.156,210.237 ; RP2.1@170.718,211.906 cw(c169.662,210.85) 171.156,210.85 cw(c172.651,210.849) RP2.1@171.594,211.906 ; R37.1@171.156,207.899 RP2.1@171.156,212.344 ; 171.156,210.236 cw(c173.264,210.236) RP2.1@171.773,211.727
NetR38_2: R38.2 U9.1 U9.7 U9.8 | length 12.9
  Top Layer w0.508: R38.2@181.864,89.916 183.617,89.916 ; R38.2@182.223,89.557 cw(c183.09,88.69) 183.09,89.916 cw(c183.09,91.142) R38.2@182.223,90.275 ; U9.8@184.366,90.121 ccw(c184.171,89.362) 183.617,89.916 ; U9.8@185.09,90.17 U9.7@185.09,91.44 ; U9.1@190.678,90.17 183.871,90.17 183.617,89.916
NetR39_2: R39.2 R40.1 U9.5 | length 8.4
  Top Layer w0.508: U9.5@185.09,93.98 185.09,95.783 185.75,96.444 R40.1@186.959,96.444 R39.2@186.959,99.441 ; R40.1@186.679,96.164 ccw(c186.003,95.488) 186.003,96.444 ccw(c186.003,97.4) R40.1@186.679,96.724
NetR41_1: R41.1 R42.2 U11.1 | length 6.2
  Top Layer w1.016: R41.1@168.768,105.842 R42.2@171.44,105.842 170.611,105.013 U11.1@170.611,102.692
NetRP1_2: RP1.2 U4.5 | length 12.6
  Top Layer w0.508: U4.5@198.501,166.573 198.501,169.164 199.644,170.307 205.08,170.307 RP1.2@207.188,172.415
NetRP2_3: RP2.3 U2.61 | length 67.9
  Top Layer w0.254: v1(146.685,183.49) 146.685,177.14 148.022,175.803 U2.61@148.022,172.811 ; v1(149.479,183.49) 163.551,183.49 164.567,184.506 164.567,210.755 RP2.3@166.156,212.344 ; v1@149.743,183.226 cw(c150.379,182.589) 150.379,183.49 cw(c150.379,184.39) v1@149.743,183.753 ; RP2.3@165.283,212.344 cw(c163.175,212.344) 164.666,210.854 cw(c166.156,209.363) RP2.3@166.156,211.471 ; RP2.3@165.537,212.344 cw(c164.043,212.344) 165.099,211.287 cw(c166.156,210.231) RP2.3@166.156,211.725
  Bottom Layer w0.254: v1(146.685,183.49) v1(149.479,183.49) ; v1@146.949,183.226 cw(c147.585,182.589) 147.585,183.49 cw(c147.585,184.39) v1@146.949,183.753 ; v1@149.215,183.226 ccw(c148.579,182.589) 148.579,183.49 ccw(c148.579,184.39) v1@149.215,183.753
NetU1_10: U1.10 U2.12 | length 49.5
  Top Layer w0.254: v1@126.66,181.544 ccw(c126.023,182.18) 126.924,182.18 ccw(c127.824,182.18) v1@127.188,181.544 ; v1(126.924,181.28) 126.924,182.27 127.406,182.753 U1.10@127.406,183.871 ; v1(143.053,158.521) 143.053,164.617 143.496,165.061 U2.12@144.272,165.061
  Bottom Layer w0.254: v1@126.924,180.907 cw(c126.924,180.006) 127.561,180.643 cw(c128.197,181.28) v1@127.297,181.28 ; v1(126.924,181.28) 128.067,180.137 128.067,161.62 131.166,158.521 v1(143.053,158.521)
NetU1_11: U1.11 U2.11 | length 44.9
  Top Layer w0.254: v1@128.413,181.848 ccw(c127.776,182.485) 128.676,182.485 ccw(c129.577,182.485) v1@128.94,181.848 ; v1(128.676,181.585) U1.11@128.676,184.048 ; v1(141.453,159.512) 142.519,160.579 142.519,164.897 143.184,165.561 U2.11@144.272,165.561
  Bottom Layer w0.254: v1(128.676,181.585) 128.676,162.306 131.47,159.512 v1(141.453,159.512)
NetU1_12: U1.12 U2.10 | length 44.5
  Top Layer w0.254: U1.12@129.946,183.871 129.946,182.651 130.531,182.067 ; v1@130.302,181.6 ccw(c129.939,182.067) 130.531,182.067 ; v1(130.531,181.305) 130.531,182.067 ; v1@130.759,181.6 cw(c131.122,182.067) 130.531,182.067 ; v1(141.453,161.112) 141.91,161.569 141.91,165.71 142.261,166.061 U2.10@144.272,166.061
  Bottom Layer w0.254: v1@130.158,181.305 cw(c129.257,181.305) 129.894,180.668 cw(c130.531,180.032) v1@130.531,180.932 ; v1(130.531,181.305) 129.261,180.035 129.261,162.839 130.988,161.112 v1(141.453,161.112)
NetU2_9: U2.9 U2.60 U8.4 | length 31.7
  Top Layer w0.254: U2.9@144.272,166.561 146.851,166.561 148.522,168.232 148.522,176.623 147.955,177.19 147.955,185.75 149.428,187.223 149.428,191.795 148.819,192.405 U8.4@147.371,192.405
NetU2_50: U2.50 U5.10 | length 38.8
  Top Layer w0.254: U2.50@153.522,172.811 153.522,173.944 154.61,175.031 168.326,175.031 169.977,173.38 169.977,165.1 171.069,164.008 178.333,164.008 179.375,165.049 U5.10@179.375,166.522
NetU2_51: U2.51 U5.9 | length 38
  Top Layer w0.254: U2.51@153.022,172.811 153.022,174.409 154.254,175.641 168.986,175.641 170.612,174.015 170.612,165.659 171.247,165.024 177.851,165.024 178.105,165.278 U5.9@178.105,166.726
NetU6_5: U6.5 U6.6 | length 1.3
  Top Layer w0.381: U6.6@180.848,161.265 U6.5@182.118,161.265
NetU8_2: U8.2 U8.3 | length 1.3
  Top Layer w0.381: U8.2@147.371,189.865 U8.3@147.371,191.135
VDD: C7.1 C13.1 C14.1 C15.1 C16.1 C18.1 C34.2 C44.1 D6.2 L1.1 L4.2 LCD1.13 LCD1.19 P6.4 R6.1 U1.16 U2.7 U2.8 U2.40 U8.14 | length 306.9
  Top Layer w0.254: U1.16@135.026,183.871 135.026,182.499 135.57,181.955 135.57,177.917 ; 138.618,154.976 141.082,154.976 145.644,159.537 145.644,161.925 149.657,165.938 154.788,165.938 155.41,166.561 158.001,166.561 159.014,167.574 C15.1@160.401,167.574 ; C14.1@138.618,156.337 140.081,156.337 140.411,156.667 140.411,162.23 141.3,163.119 141.3,166.548 141.813,167.061 U2.8@144.272,167.061 ; C13.1@138.618,159.131 139.598,159.131 ; C14.1@138.988,155.967 cw(c139.881,155.074) 139.881,156.337 cw(c139.881,157.6) C14.1@138.988,156.707 ; C13.1@139.052,158.84 cw(c139.598,158.474) 139.598,159.131 ; C13.1@139.052,159.422 ccw(c139.598,159.788) 139.598,159.131 ; U2.7@144.272,167.561 141.297,167.561 140.792,167.056 140.792,163.728 139.852,162.789 139.852,159.385 139.598,159.131
  Top Layer w0.381: C18.1@157.038,138.557 157.038,139.69 157.632,140.284 ; C16.1@162.387,139.017 ccw(c161.915,139.61) 162.673,139.61 ; C16.1@162.673,138.557 162.673,139.61 ; C16.1@162.959,139.017 cw(c163.431,139.61) 162.673,139.61 ; 163.347,140.284 162.673,139.61
  Top Layer w0.508: 124.765,140.284 166.192,140.284 LCD1.19@167.64,141.732 ; 125.882,160.477 133.604,160.477 134.036,160.045 134.036,152.857 134.274,152.619 L1.1@137.922,152.619 137.922,154.28 138.618,154.976 C13.1@138.618,159.131 ; L1.1@137.563,152.26 ccw(c136.696,151.393) 136.696,152.619 ccw(c136.696,153.845) 137.563,152.978 ccw(c136.696,153.845) 137.922,153.845 ccw(c139.148,153.845) L1.1@138.281,152.978 ; 139.553,198.531 cw(c140.611,197.473) D6.2@141.244,198.83 ; 139.675,177.876 139.675,198.653 140.081,199.06 ; 139.751,188.595 U8.14@141.783,188.595 141.783,186.284 142.291,185.776 C34.2@143.474,185.776 ; 139.835,198.813 cw(c140.539,198.109) D6.2@141.186,198.867 ; 140.066,199.044 cw(c140.937,198.173) D6.2@141.458,199.29 ; 140.223,199.202 cw(c140.897,198.528) D6.2@141.516,199.253 ; D6.2@140.679,198.701 ccw(c140.081,198.383) 140.081,199.06 ; D6.2@140.679,199.418 cw(c140.081,199.737) 140.081,199.06 ; D6.2@141.351,199.06 140.081,199.06 ; C34.2@143.194,185.496 ccw(c142.518,184.82) 142.518,185.776 ccw(c142.518,186.732) C34.2@143.194,186.056 ; 159.537,140.284 160.02,140.767 ; LCD1.13@159.731,141.329 cw(c159.329,140.767) 160.02,140.767 ; LCD1.13@160.02,141.732 160.02,140.767 ; LCD1.13@160.309,141.329 ccw(c160.711,140.767) 160.02,140.767 ; LCD1.19@167.144,141.732 cw(c165.947,141.732) 166.793,140.885 cw(c167.64,140.039) LCD1.19@167.64,141.236
  Top Layer w0.762: 125.882,176.505 127.254,177.876 R6.1@141.976,177.876
  Top Layer w1.016: P6.4@122.428,179.324 124.587,179.324 125.882,178.029 125.882,160.477 122.403,156.997 122.403,142.646 153.67,111.379 153.67,105.639 ; C44.1@151.958,100.965 151.958,103.927 153.67,105.639 ; 152.506,104.474 ccw(c150.796,106.184) L4.2@153.171,106.639 ; L4.2@153.311,107.093 ccw(c152.444,107.96) 153.67,107.96 ccw(c154.896,107.96) L4.2@154.029,107.093 ; L4.2@153.342,106.346 cw(c152.743,105.639) 153.67,105.639 ; L4.2@153.998,106.346 ccw(c154.597,105.639) 153.67,105.639
VDDA: C1.1 C11.1 C12.1 L1.2 R1.1 U2.19 | length 38
  Top Layer w0.254: C11.1@144.526,152.619 145.863,152.619 ; C11.1@144.821,152.378 cw(c145.328,151.966) 145.328,152.619 cw(c145.328,153.272) C11.1@144.821,152.86 ; C11.1@145.018,152.218 cw(c145.863,151.53) 145.863,152.619 ; C11.1@145.018,153.02 ccw(c145.863,153.708) 145.863,152.619 ; U2.19@147.522,160.811 147.522,159.155 146.37,158.003 146.37,153.126 145.863,152.619
  Top Layer w0.508: C1.1@133.248,145.517 ccw(c132.572,146.193) 133.528,146.193 ccw(c134.484,146.193) C1.1@133.808,145.517 ; R1.1@133.248,148.391 cw(c132.572,147.715) 133.528,147.715 cw(c134.484,147.715) R1.1@133.808,148.391 ; C1.1@133.528,145.237 R1.1@133.528,148.671 140.365,148.671 141.351,149.657 L1.2@141.351,152.619 C11.1@144.526,152.619 ; L1.2@140.992,152.26 cw(c140.125,151.393) 141.351,151.393 cw(c142.577,151.393) L1.2@141.71,152.26 ; C11.1@144.167,152.26 ccw(c143.3,151.393) 143.3,152.619 ccw(c143.3,153.845) C11.1@144.167,152.978
VREF: C5.1 D1.3 R1.2 R2.1 R10.2 U2.18 | length 131.3
  Top Layer w0.254: R1.2@133.528,150.571 138.455,150.571 139.573,151.689 139.573,153.137 140.487,154.051 141.376,154.051 147.022,159.697 U2.18@147.022,160.811
  Top Layer w0.508: C5.1@130.2,145.517 ccw(c129.524,146.193) 130.48,146.193 ccw(c131.436,146.193) C5.1@130.76,145.517 ; R2.1@130.2,148.391 cw(c129.524,147.715) 130.48,147.715 cw(c131.436,147.715) R2.1@130.76,148.391 ; R2.1@130.48,148.671 C5.1@130.48,145.237 131.37,145.237 131.827,145.694 D1.3@131.827,153.761 ; v1@131.652,146.841 cw(c131.229,146.418) 131.827,146.418 ; v1@131.652,147.189 ccw(c131.229,147.613) 131.827,147.613 ; 131.827,146.425 cw(c132.416,146.425) v1@132,146.841 ; 131.827,147.606 ccw(c132.416,147.606) v1@132,147.189 ; 131.827,151.079 132.335,150.571 R1.2@133.528,150.571 ; v1@137.973,136.881 v1(145.136,136.881) ; v1@138.096,136.707 cw(c138.516,136.287) 138.516,136.881 cw(c138.516,137.474) v1@138.096,137.055 ; v1@144.962,136.707 ccw(c144.542,136.287) 144.542,136.881 ccw(c144.542,137.474) v1@144.962,137.055 ; v1(179.045,136.881) 179.045,150.546 180.086,151.587 192.075,151.587 193.015,152.527 R10.2@195.229,152.527
  Bottom Layer w0.508: v1(131.826,147.015) 137.262,147.015 137.922,146.355 v1(137.922,136.881) ; v1@132,146.841 cw(c132.42,146.421) 132.42,147.015 cw(c132.42,147.609) v1@132,147.189 ; v1(145.136,136.881) v1(179.045,136.881) ; v1@145.31,136.707 cw(c145.729,136.287) 145.729,136.881 cw(c145.729,137.474) v1@145.31,137.055 ; v1@178.871,136.707 ccw(c178.451,136.287) 178.451,136.881 ccw(c178.451,137.474) v1@178.871,137.055
pads on no net: K13.2 K13.7 K14.2 K14.3 K14.4 S1.0 S1.2 S1.4 S1.5 S1.6 U1.8 U1.9 U5.1 U5.12 U7.5 U7.6 U7.7 U8.5 U8.6 U8.8 U8.9 U8.10 U8.11 U8.12 U8.13 U10.4

## Polygon pours and split planes (outlines as drawn)
GND on Top Layer (hatched 90Degree grid 0.254 track 0.254, remove dead copper): 129.667,76.378 210.718,76.378 210.718,133.325 220.624,143.231 220.624,219.405 119.761,219.405 119.761,143.281 129.718,133.325
GND on Bottom Layer (hatched 90Degree grid 0.254 track 0.254, remove dead copper): 129.642,76.505 210.744,76.505 210.744,133.502 220.523,143.281 220.523,219.304 119.736,219.304 119.736,143.281 129.718,133.299

## Keep-outs
Keep-Out Layer:
  circle w0.254: c217.675,216.335 r1.5
  circle w0.254: c122.775,216.335 r1.5
  circle w0.254: c132.725,137.335 r1.5
  circle w0.254: c207.725,137.335 r1.5
  circle w0.254: c282.146,137.335 r1.5
  circle w0.254: c357.146,137.335 r1.5
  circle w0.254: c357.146,79.335 r1.5
  circle w0.254: c282.146,79.335 r1.5
  circle w0.254: c207.725,79.335 r1.5
  circle w0.254: c132.725,79.335 r1.5
  lines w0.254: 119.775,143.335 119.775,219.335 220.675,219.335 220.675,143.335 210.725,133.387 210.725,76.335 129.725,76.335 129.725,133.387 119.775,143.335 ; 279.146,76.335 279.146,140.335 360.146,140.335 360.146,76.335 279.146,76.335

## Silkscreen, mask and mechanical layers (free items; w line width, h text height)
Top Overlay:
  drawing of 271 lines, arcs and shapes, not listed
  text "100.9 (mm)" at 162.711,241.58 h1.52
  text "76 (mm)" at 223.266,176.478 h1.52 r90
  text "78 (mm)" at 316.297,159.614 h1.52
  text "72 (mm)" at 319.297,157.074 h1.52
  text "51 (mm)" at 329.923,154.661 h1.52
  text "30 (mm)" at 340.297,152.121 h1.52
  text "9 (mm)" at 351.558,146.586 h1.52
  text "81 (mm)" at 314.923,142.723 h1.52
  text "143 (mm)" at 114.452,142.19 h1.52 r90
  text "3 (mm)" at 354.558,142.014 h1.52
  text "3 (mm)" at 375.257,134.747 h1.52 r90
  text "9 (mm)" at 382.623,131.747 h1.52 r90
  text "23 (mm)" at 385.724,123.986 h1.52 r90
  text "29 (mm)" at 390.042,120.986 h1.52 r90
  text "193 (mm)" at 103.987,117.345 h1.52 r90
  text "39 (mm)" at 393.217,115.986 h1.52 r90
  text "49 (mm)" at 396.011,110.986 h1.52 r90
  text "55 (mm)" at 399.059,107.986 h1.52 r90
  text "61 (mm)" at 402.234,105.109 h1.52 r90
  text "64 (mm)" at 365.912,103.224 h1.52 r90
  text "39.345 (mm)" at 117.221,88.088 h1.52 r90
  text "29.667 (mm)" at 119.634,83.236 h1.52 r90
  text "22.479 (mm)" at 122.072,79.604 h1.52 r90
  text "12.243 (mm)" at 127.164,74.831 h1.52 r90
  text "25.5 (mm)" at 341.15,73.508 h1.52
  text "81 (mm)" at 165.648,70.917 h1.52
  text "40.5 (mm)" at 333.65,69.063 h1.52
  text "55.5 (mm)" at 326.15,64.237 h1.52

## Text inside footprints (layer, text, board x,y; h text height)
LCD1: Top Overlay "2" at 142.621,144.069 h1.02; Top Overlay "1" at 142.824,141.224 h1.02; Top Overlay "19" at 169.164,141.224 h1.02; Top Overlay "20" at 169.164,143.764 h1.02